# EAGLE board SK.v0.2 (EAGLE 6.1)
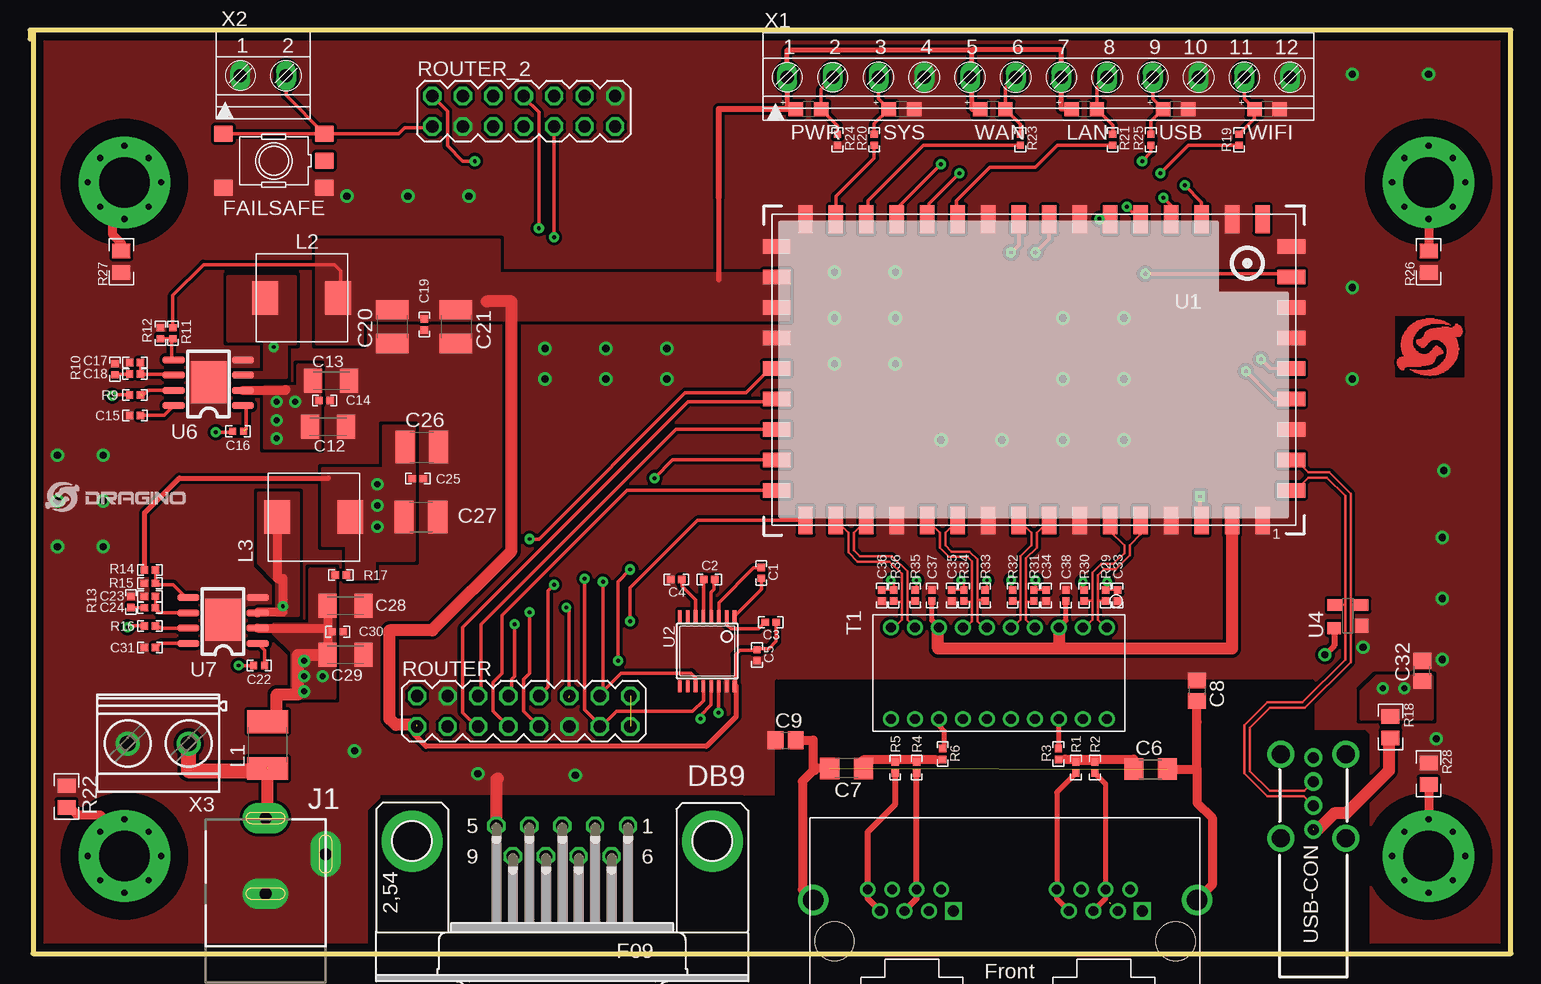
[diagram p0: board, top side]
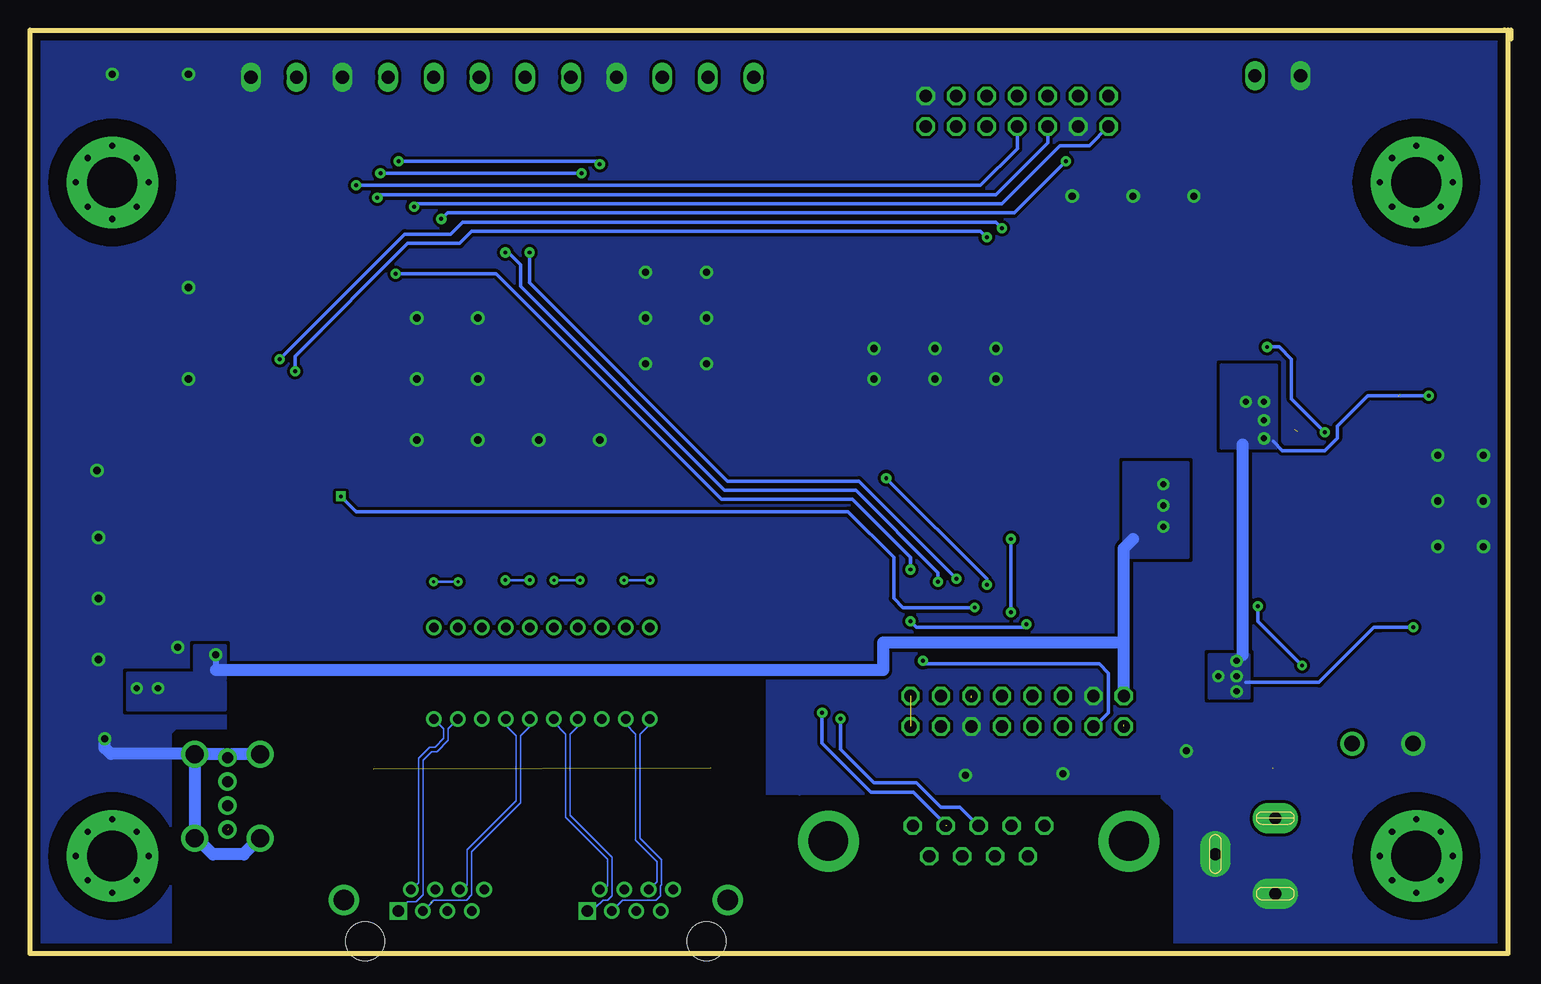
[diagram p1: board, bottom side, seen from below]

Size 123.44 x 76.96 mm. Coordinates in mm from the lower left corner, seen from the top.
Outline: 0.51,76.96 0.25,76.96 0.25,0 123.44,0 123.44,76.96 0,76.96 0,76.2
Copper layers (1*16): Top 0.035mm / dielectric 1.5mm / Bottom 0.035mm
Design rules: minimum track width 5mil, minimum drill 10mil, track to track 8mil, track to pad 8mil, pad to pad 8mil, via to via 10mil, smd to smd 8mil, copper to edge 26mil, drill to drill 10mil, minimum pad ring 10mil, minimum via ring 10mil, stop-mask expansion 1mil, vias tented up to drill 30mil, thermal gap 10mil
Net classes: 0 default: width 0.203 mm, clearance 0.254 mm; 1 power: width 0.61 mm, drill 0.406 mm, clearance 0.254 mm; 2 gnd: width 0.305 mm, drill 0.305 mm, clearance 0.254 mm; 3 usbvcc: width 0.508 mm, drill 0.61 mm, clearance 0.254 mm; 4 aref: width 0.406 mm, drill 0.61 mm, clearance 0.254 mm
tRestrict: area 28.2,0.3 to 60.5,13.2; area 59.4,0 to 111.5,22.7
bRestrict: area 28.2,0.3 to 60.5,13.2; area 59.4,0 to 111.5,22.7

## Footprints (pad centres in the part's own frame; a part is rotated, then mirrored left to right if it is on the bottom)
C0402 = smd 0.61 x 0.61: 1 -0.457,0; 2 0.457,0
C1206 = smd 1.6 x 1.8: 1 -1.4,0; 2 1.4,0
C0805 = smd 1.3 x 1.5: 1 -0.85,0; 2 0.85,0
C1206K = smd 1.5 x 2: 1 -1.5,0; 2 1.5,0
C1210 = smd 1.6 x 2.7: 1 -1.4,0; 2 1.4,0
F09HP = drill 1.016 octagon: 1 -5.486,-1.27; 2 -2.743,-1.27; 3 0,-1.27; 4 2.743,-1.27; 5 5.486,-1.27; 6 -4.115,1.27; 7 -1.372,1.27; 8 1.372,1.27; 9 4.115,1.27 | drill 3.302 pad 5.08: G1 -12.522,0; G2 12.522,0
TS42 = smd 1.6 x 1.4: 1 -4.2,2.25; 2 4.2,2.25; 3 -4.2,-2.25; 4 4.2,-2.25; 5 -4.2,0
POWER_JACK_SLOT = drill 1 pad 2.54 long: GND@1 2.58,7.5; GND@2 7.58,10.8; PWR 2.58,13.8
ETHERNET-1X2 = drill 0.94 pad 1.27 square: 1-1 4.305,-2.54; 2-1 -11.445,-2.54 | drill 0.8: 1-2 5.325,-4.32; 1-3 6.345,-2.54; 1-4 7.365,-4.32; 1-5 8.385,-2.54; 1-6 9.405,-4.32; 1-7 10.425,-2.54; 1-8 11.445,-4.32; 2-2 -10.425,-4.32; 2-3 -9.405,-2.54; 2-4 -8.385,-4.32; 2-5 -7.365,-2.54; 2-6 -6.345,-4.32; 2-7 -5.325,-2.54; 2-8 -4.305,-4.32 | drill 1.7: S1 16,-3.43; S2 -16,-3.43 | hole 3.25: -14.225,0; 14.225,0
L1812 = smd 1.9 x 3.4: 1 -1.95,0; 2 1.95,0
INDUCTOR-74 = smd 2.794 x 2.159: P$1 0,3.048; P$2 0,-3.048
CHIP-LED0805 = smd 1.2 x 1.2: A 0,-1.05; C 0,1.05
R0402 = smd 0.61 x 0.61: 1 -0.457,0; 2 0.457,0
R0805 = smd 1.2 x 1.5: 1 -0.9,0; 2 0.9,0
MA08-2 = drill 1.016 octagon: 1 -8.89,-1.27; 2 -8.89,1.27; 3 -6.35,-1.27; 4 -6.35,1.27; 5 -3.81,-1.27; 6 -3.81,1.27; 7 -1.27,-1.27; 8 -1.27,1.27; 9 1.27,-1.27; 10 1.27,1.27; 11 3.81,-1.27; 12 3.81,1.27; 13 6.35,-1.27; 14 6.35,1.27; 15 8.89,-1.27; 16 8.89,1.27
MA07-2 = drill 1.016 octagon: 1 -7.62,-1.27; 2 -7.62,1.27; 3 -5.08,-1.27; 4 -5.08,1.27; 5 -2.54,-1.27; 6 -2.54,1.27; 7 0,-1.27; 8 0,1.27; 9 2.54,-1.27; 10 2.54,1.27; 11 5.08,-1.27; 12 5.08,1.27; 13 7.62,-1.27; 14 7.62,1.27
RIONET_H2038 = drill 0.8: 1 -3.81,9; 2 -3.81,7; 3 -3.81,5; 4 -3.81,3; 5 -3.81,1; 6 -3.81,-1; 7 -3.81,-3; 8 -3.81,-5; 9 -3.81,-7; 10 -3.81,-9; 11 3.81,-9; 12 3.81,-7; 13 3.81,-5; 14 3.81,-3; 15 3.81,-1; 16 3.81,1; 17 3.81,3; 18 3.81,5; 19 3.81,7; 20 3.81,9
HE50 = smd 1.2 x 2.3: 1 -19.05,12.55; 2 -16.51,12.55; 3 -13.97,12.55; 4 -11.43,12.55; 5 -8.89,12.55; 6 -6.35,12.55; 7 -3.81,12.55; 8 -1.27,12.55; 9 1.27,12.55; 10 3.81,12.55; 11 6.35,12.55; 12 8.89,12.55; 13 11.43,12.55; 14 13.97,12.55; 15 16.51,12.55; 16 19.05,12.55; 26 19.05,-12.55; 27 16.51,-12.55; 28 13.97,-12.55; 29 11.43,-12.55; 30 8.89,-12.55; 31 6.35,-12.55; 32 3.81,-12.55; 33 1.27,-12.55; 34 -1.27,-12.55; 35 -3.81,-12.55; 36 -6.35,-12.55; 37 -8.89,-12.55; 38 -11.43,-12.55; 39 -13.97,-12.55; 40 -16.51,-12.55; 41 -19.05,-12.55 | smd 2.3 x 1.2: 17 21.45,10.05; 18 21.45,7.51; 19 21.45,4.97; 20 21.45,2.43; 21 21.45,-0.11; 22 21.45,-2.65; 23 21.45,-5.19; 24 21.45,-7.73; 25 21.45,-10.27; 42 -21.45,-10.27; 43 -21.45,-7.73; 44 -21.45,-5.19; 45 -21.45,-2.65; 46 -21.45,-0.11; 47 -21.45,2.43; 48 -21.45,4.97; 49 -21.45,7.51; 50 -21.45,10.05
MAXIM_-_??_TSSOP16 = smd 0.305 x 0.991: 1 -2.275,-2.918; 2 -1.625,-2.918; 3 -0.975,-2.918; 4 -0.325,-2.918; 5 0.325,-2.918; 6 0.975,-2.918; 7 1.625,-2.918; 8 2.275,-2.918; 9 2.275,2.918; 10 1.625,2.918; 11 0.975,2.918; 12 0.325,2.918; 13 -0.325,2.918; 14 -0.975,2.918; 15 -1.625,2.918; 16 -2.275,2.918
SOT143 = smd 1.194 x 1.118: 1 -0.72,-1.181 | smd 0.991 x 1.194: 2 1.007,-1.143; 3 1.007,1.067 | smd 0.991 x 1.118: 4 -0.923,1.105
RT8250-SOP8 = smd 1.88 x 0.61: 1 -1.219,0; 2 -1.219,-1.27; 3 -1.219,-2.54; 4 -1.219,-3.81; 5 4.547,-3.81; 6 4.547,-2.54; 7 4.547,-1.27; 8 4.547,0 | smd 2.997 x 3.505: 9 1.651,-1.956
METAL_HOLE = drill 4.191 pad 7.62: P$1 0,0 | drill 0.508 pad 0.61: P$2 3.048,0; P$3 -3.048,0; P$4 0,3.048; P$5 0,-3.048; P$6 -2.032,2.032; P$7 2.032,2.032; P$8 2.032,-2.032; P$9 -2.032,-2.032
CON-USB-AH = drill 0.914 pad 1.524: 1 0,1.877; 2 0,3.876; 3 0,5.875; 4 0,7.874 | drill 1.499 pad 2.159: 5 -2.718,1.148; 6 -2.718,8.146; 7 2.718,1.148; 8 2.718,8.146
12POL381 = drill 1.1 long: 1 0,0; 2 3.81,0; 3 7.62,0; 4 11.43,0; 5 15.24,0; 6 19.05,0; 7 22.86,0; 8 26.67,0; 9 30.48,0; 10 34.29,0; 11 38.1,0; 12 41.91,0
2POL381 = drill 1.1 long: 1 0,0; 2 3.81,0
MKDSN1,5/2-5,08 = drill 1.3 pad 2: 1 -2.561,0.025; 2 2.519,0.025

## Placement (x,y rotation side)
C1  0.1u  [C0402]  60.97,31.72 90 top
C2  0.1u  [C0402]  56.62,31.17 0 top
C3  0.1u  [C0402]  61.75,27.61 180 top
C4  0.1u  [C0402]  53.87,31.17 180 top
C5  0.1u  [C0402]  60.61,24.87 90 top
C6  1000pF,2kv  [C1206]  93.41,15.37 0 top
C7  1000pF,2kv  [C1206]  68.07,15.43 180 top
C8  0.1u,100V  [C0805]  97.28,21.91 270 top
C9  0.1u,100V  [C0805]  62.99,17.78 0 top
C12  10uf,25v  [C1206K]  24.86,43.89 0 top
C13  10u,25v  [C1206K]  25.11,47.75 0 top
C14  NL  [C0402]  24.56,46.09 0 top
C15  0.1u,10v  [C0402]  8.76,44.85 180 top
C16  0.01u,16v  [C0402]  17.35,43.52 180 top
C17  NL  [C0402]  8.76,49.25 0 top
C18  3900pf,25v  [C0402]  8.76,48.29 0 top
C19  NL  [C0402]  32.88,52.43 90 top
C20  22u,10v  [C1210]  30.2,52.24 270 top
C21  22u,10v  [C1210]  35.51,52.24 270 top
C22  0.01u,16v  [C0402]  19.1,24.01 180 top
C23  NL  [C0402]  10.01,29.77 0 top
C24  3900pf,25v  [C0402]  10.01,28.82 0 top
C25  NL  [C0402]  32.33,39.57 180 top
C26  22u,10v  [C1210]  32.67,42.2 0 top
C27  22u,10v  [C1210]  32.6,36.38 0 top
C28  10uf,25v  [C1206K]  26.3,28.96 0 top
C29  10u,25v  [C1206K]  26.3,24.92 0 top
C30  NL  [C0402]  25.65,26.81 0 top
C31  0.1u,10v  [C0402]  10.01,25.51 180 top
C32  10u,10V  [C0805]  116.04,23.55 90 top
C33  0.1u 10v  [C0402]  90.68,29.85 270 top
C34  0.1u 10v  [C0402]  84.71,29.85 270 top
C35  0.1u 10v  [C0402]  76.83,29.85 270 top
C36  0.1u 10v  [C0402]  70.99,29.85 270 top
C37  0.1u  [C0402]  75.18,29.85 90 top
C38  0.1u  [C0402]  86.36,29.85 90 top
DB9  [F09HP]  44.37,9.37 180 top
FAILSAFE  [TS42]  20.33,66.06 180 top
J1  POWER_JACKSLT  [POWER_JACK_SLOT]  17.05,-2.51 0 top
J2  ETHERNET_2PORT  [ETHERNET-1X2]  81.28,1.02 180 top
L1  2A  [L1812]  19.82,17.38 90 top
L2  10uH  [INDUCTOR-74]  22.65,54.65 90 top
L3  15uH  [INDUCTOR-74]  23.66,36.36 90 top
LAN  [CHIP-LED0805]  87.88,70.36 270 top
PWR  [CHIP-LED0805]  64.9,70.36 270 top
R1  75  [R0402]  87.19,15.49 270 top
R2  75  [R0402]  88.77,15.49 270 top
R3  75  [R0402]  85.73,16.64 270 top
R4  75  [R0402]  73.91,15.49 270 top
R5  75  [R0402]  72.14,15.49 270 top
R6  75  [R0402]  76.07,16.64 270 top
R9  100K  [R0402]  8.76,46.56 180 top
R10  6.81K  [R0402]  7.08,48.69 270 top
R11  26.1K  [R0402]  11.91,51.69 90 top
R12  10K  [R0402]  10.88,51.69 270 top
R13  6.81K  [R0402]  8.42,29.29 270 top
R14  45.3K  [R0402]  10.01,31.97 180 top
R15  10K  [R0402]  10.01,30.85 0 top
R16  100K  [R0402]  10.01,27.31 180 top
R17  NL  [R0402]  25.91,31.55 180 top
R18  0R  [R0805]  113.4,18.87 270 top
R19  270  [R0402]  100.79,67.82 90 top
R20  270  [R0402]  70.37,67.82 90 top
R21  330  [R0402]  90.25,67.82 90 top
R22  NL  [R0805]  3.05,13.08 270 top
R23  330  [R0402]  82.56,67.82 90 top
R24  330  [R0402]  67.32,67.82 90 top
R25  270  [R0402]  93.44,67.82 90 top
R26  NL  [R0805]  116.59,57.66 90 top
R27  NL  [R0805]  7.62,57.66 90 top
R28  NL  [R0805]  116.59,14.99 270 top
R29  49.9  [R0402]  89.66,29.85 90 top
R30  49.9  [R0402]  87.88,29.85 90 top
R31  49.9  [R0402]  83.69,29.85 90 top
R32  49.9  [R0402]  81.91,29.85 90 top
R33  49.9  [R0402]  79.63,29.85 90 top
R34  49.9  [R0402]  77.85,29.85 90 top
R35  49.9  [R0402]  73.79,29.85 90 top
R36  49.9  [R0402]  72.01,29.85 90 top
ROUTER  [MA08-2]  41.16,20.19 0 top
ROUTER_2  [MA07-2]  41.16,70.19 0 top
SYS  [CHIP-LED0805]  72.64,70.36 270 top
T1  RJ45_TRANSFORMER_HST2038DR  [RIONET_H2038]  80.77,23.37 270 top
U1  HE  [HE50]  83.69,48.64 180 top
U2  ADM3202A"  [MAXIM_-_??_TSSOP16]  56.46,25.2 180 top
U4  YSSR05  [SOT143]  109.83,28.04 90 top
U6  RT8250  [RT8250-SOP8]  16.54,45.66 180 top
U7  RT8250  [RT8250-SOP8]  17.75,25.85 180 top
U$1  LOGO-NEW  [LOGO-SILK-NEW]  1.27,36.83 0 top
U$2  [DRGAINO_LOGO_STOP]  113.79,48.01 0 top
U$11  METAL-HOLE  [METAL_HOLE]  7.87,8.13 0 top
U$12  METAL-HOLE  [METAL_HOLE]  116.59,64.26 0 top
U$13  METAL-HOLE  [METAL_HOLE]  7.87,64.26 0 top
U$14  METAL-HOLE  [METAL_HOLE]  116.59,8.13 0 top
USB  [CHIP-LED0805]  95.5,70.36 270 top
USB-CON  USB-CON-AVERTICAL  [CON-USB-AH]  106.98,8.46 0 top
WAN  [CHIP-LED0805]  80.26,70.36 270 top
WIFI  [CHIP-LED0805]  103.12,70.36 270 top
X1  [12POL381]  63.12,73.03 0 top
X2  [2POL381]  17.53,73.15 0 top
X3  [MKDSN1,5/2-5,08]  10.67,17.53 180 top

## Library data of the parts
C1-C9 C12-C38 FAILSAFE J1 J2 L1-L3 LAN PWR R1-R6 R9-R36 SYS T1 U1 U2 U4 U6 U7 U$1 U$2 U$11-U$14 USB USB-CON WAN WIFI = dragino
DB9 = con-subd; OC_FARNELL: unknown; OC_NEWARK: unknown
ROUTER ROUTER_2 = dragino; OC_FARNELL: unknown; OC_NEWARK: unknown
X1 X2 = con-phoenix-381
X3 = con-phoenix-508; MPN: MKDSN 1,5/2-5.08; OC_FARNELL: 1792903; OC_NEWARK: 30M2397

## Nets
2.0V_CTL: C37.1 C38.1 T1.3 T1.8 U1.2
3.3V: C3.1 C5.2 C19.2 C20.1 C21.1 L2.P$2 LAN.A PWR.A R11.2 ROUTER.1 U1.23 U1.24 U2.16 WAN.A X1.1 X1.5 X1.7
5-GND: FAILSAFE.5
+5V: C25.2 C26.1 C27.1 C32.1 L3.P$2 R14.2 R17.1 R18.1 ROUTER.2 U4.4
AGND: C6.2 C7.2 C8.2 C9.2 J2.S1 J2.S2
GND [gnd]: C4.2 C5.1 C8.1 C9.1 C12.2 C13.2 C14.2 C15.2 C17.1 C19.1 C20.2 C21.2 C23.1 C25.1 C26.2 C27.2 C28.2 C29.2 C30.2 C31.2 C32.2 C33.2 C34.2 C35.2 C36.2 C37.2 C38.2 DB9.5 FAILSAFE.1 FAILSAFE.2 J1.GND@1 J1.GND@2 R10.1 R12.1 R13.1 R15.1 R22.1 R24.1 R26.1 R27.1 R28.1 ROUTER.4 ROUTER.11 ROUTER_2.3 ROUTER_2.14 SYS.C U1.1 U1.4 U1.7 U1.10 U1.13 U1.22 U1.25 U1.26 U1.32 U1.35 U1.40 U1.42 U1.44 U1.45 U1.48 U2.15 U4.1 U6.4 U6.9 U7.4 U7.9 USB-CON.4 USB-CON.5 USB-CON.6 USB-CON.7 USB-CON.8 USB.C WIFI.C X1.4 X1.10 X1.12 X2.1 X3.2
GPIO11: FAILSAFE.3 FAILSAFE.4 ROUTER_2.1 U1.37 X2.2
GPIO12: ROUTER_2.2 U1.36
GPIO15: ROUTER_2.5 U1.38
GPIO16: ROUTER_2.7 U1.39
GPIO18: ROUTER.10 U1.18
GPIO19: ROUTER.6 U1.19
GPIO20: ROUTER.5 U1.20
GPIO21: ROUTER.8 U1.16
GPIO22: ROUTER.7 U1.17
GPIO23: ROUTER.9 U1.21
GPIO24: ROUTER.12 U1.3
GPIO26: ROUTER_2.9 U1.47
GPIO27: ROUTER_2.8 U1.46
GPIO28: R20.1 U1.27
LED0: R19.1 U1.30
LED1: R25.1 U1.29
LED2: R21.1 U1.31
LED6: R23.1 U1.28
N$1: C1.2 U2.3
N$2: C1.1 U2.1
N$3: C2.2 U2.4
N$4: C2.1 U2.5
N$5: C3.2 U2.2
N$6: C4.1 U2.6
N$7: R6.1 T1.13
N$10: DB9.2 U2.14
N$11: DB9.3 U2.13
N$12: J1.PWR L1.1 X3.1
N$13: R9.1 U6.7
N$15: R22.2 U$11.P$1
N$16: C15.1 U6.8
N$17: C16.1 U6.1
N$18: C16.2 L2.P$1 U6.3
N$19: C17.2 C18.2 U6.6
N$20: C18.1 R10.2
N$21: R18.2 USB-CON.1
N$22: R11.1 R12.2 U6.5
N$23: R19.2 WIFI.A X1.11
N$24: C22.1 U7.1
N$25: C22.2 L3.P$1 U7.3
N$26: C23.2 C24.2 U7.6
N$27: C24.1 R13.2
N$28: R20.2 SYS.A X1.3
N$29: R14.1 R15.2 U7.5
N$30: LAN.C R21.2 X1.8
N$31: R16.1 U7.7
N$32: C31.1 U7.8
N$33: R26.2 U$12.P$1
N$34: R23.2 WAN.C X1.6
N$35: PWR.C R24.2 X1.2
N$36: R25.2 USB.A X1.9
N$37: R27.2 U$13.P$1
N$38: R28.2 U$14.P$1
N$39: C35.1 R33.2 R34.2
N$40: C36.1 R35.2 R36.2
N$41: J2.2-7 J2.2-8 R1.2
N$42: J2.2-4 J2.2-5 R2.2
N$43: C33.1 R29.2 R30.2
N$44: C34.1 R31.2 R32.2
N$45: R3.1 T1.18
N$46: C6.1 R1.1 R2.1 R3.2
N$51: J2.1-7 J2.1-8 R5.2
N$52: J2.1-4 J2.1-5 R4.2
N$54: C7.1 R4.1 R5.1 R6.2
NC: ROUTER.15 ROUTER.16
OPTIONAL_ANT: U1.41
P0_R_N: J2.2-6 T1.17
P0_R_P: J2.2-3 T1.16
P0_RX_N: R31.1 T1.4 U1.8
P0_RX_P: R32.1 T1.5 U1.9
P0_T_N: J2.2-2 T1.20
P0_T_P: J2.2-1 T1.19
P0_TX_N: R29.1 T1.1 U1.5
P0_TX_P: R30.1 T1.2 U1.6
P4_R_N: J2.1-6 T1.12
P4_R_P: J2.1-3 T1.11
P4_RX_N: R35.1 T1.9 U1.14
P4_RX_P: R36.1 T1.10 U1.15
P4_T_N: J2.1-2 T1.15
P4_T_P: J2.1-1 T1.14
P4_TX_N: R33.1 T1.6 U1.11
P4_TX_P: R34.1 T1.7 U1.12
RESET_ROUTE: ROUTER.3 U1.43
UART_RX: ROUTER.13 U1.33 U2.12
UART_TX: ROUTER.14 U1.34 U2.11
USB_N: U1.50 U4.3 USB-CON.2
USB_P: U1.49 U4.2 USB-CON.3
VIN: C12.1 C13.1 C14.1 C28.1 C29.1 C30.1 L1.2 R9.2 R16.2 R17.2 U6.2 U7.2

## Tracks (layer width: path | path; a pad name or v marks a point on that pad's centre or on a via)
2.0V_CTL
  Top 0.406: T1.3 86.36,27.77 C38.1 | T1.8 75.18,27.77 C37.1
  Top 1.016: U1.2 100.2,25.4 85.77,25.4 | 85.77,25.4 75.69,25.4 75.69,27.18 T1.8 | T1.3 85.77,25.4
3.3V  (1 unrouted)
  Top 0.305: R11.2 11.91,54.84 14.48,57.4 25.4,57.4 25.91,56.9 25.91,55.12 25.65,54.86 | C3.1 62.2,26.01 61.59,25.4 60.71,25.4 60.61,25.3 | 60.61,25.3 C5.2 60.66,25.32 60.71,25.27 | 60.61,25.3 60.58,25.27 59.18,25.27 58.8,24.89 58.8,22.36 U2.16 58.86,22.29
  Top 0.406: 57.4,64.01 57.4,62.99 57.4,56.13 | 58.86,22.29 58.86,19.75 56.39,17.27 33.02,17.27 32,18.29 32,18.8 32.26,19.05 | 78.49,75.31 63.12,75.31 X1.1 63.12,70.36 PWR.A | 78.49,75.31 78.49,73.03 | 78.49,73.03 X1.5 | 78.49,75.31 85.98,75.31 X1.7 85.98,70.36 LAN.A | 78.49,73.03 78.49,70.36 WAN.A
  Top 0.508: PWR.A 57.4,70.36 57.4,62.99
  Top 1.016: ROUTER.1 32.14,19.05 30.48,19.05 29.97,19.56 29.97,26.92 33.53,26.92 40.13,33.53 40.13,54.36 38.1,54.36
  pour Top (no thermals): 23.88,59.44 23.88,50.8 27.69,50.8 27.69,52.83 39.12,52.83 39.12,59.44
  pour Top (no thermals): 39.12,56.13 39.12,56.64 63.25,56.64 63.25,52.83 38.86,52.83 38.86,56.13
+5V  (via drill 0.51 pad 0.81, 0.58)
  Top 0.406: R14.2 9.55,36.73 12.45,39.62 24.89,39.62
  Top 0.508: U4.4 108.72,25.66 v107.95,24.89
  Bottom 0.508: v107.95,24.89 107.95,23.62
  Bottom 1.016: 32.27,25.91 32.27,33.77 31.5,34.54 | ROUTER.2 32.27,25.91 | 32.27,25.91 52.32,25.91 52.32,23.62 107.95,23.62
  other vias: 28.96,39.12 28.96,37.34 28.96,35.56 112.78,22.1 114.55,22.1
  pour Top (no thermals): 26.42,31.24 26.42,34.04 24.38,34.04 24.38,40.39 29.46,40.39 29.46,43.94 32,43.94 32,32.77 28.7,32.77 28.7,31.24
  pour Bottom: 26.92,40.89 26.92,33.02 32.26,33.02 32.26,40.89
  pour Bottom (no thermals): 107.19,25.65 107.19,20.32 115.32,20.32 115.32,23.37 109.73,23.37 109.73,25.65
  pour Top (no thermals): 111,21.84 112.27,23.11 116.84,23.11 116.84,19.56 111,19.56
AGND  (1 unrouted)
  Top 0.762: C6.2 97.28,15.37 | C7.2 65.28,15.43 | 65.28,15.43 65.28,15.24 | J2.S1 64.39,5.33 64.39,14.35 65.28,15.24 | C9.2 65.28,17.78 65.28,15.43 | 65.41,15.24 65.28,15.24 | 97.28,15.37 97.28,19.28 C8.2 | 97.28,15.37 97.28,12.58 98.55,11.3 98.55,5.72 J2.S2
GND  (via drill 0.6)
  Top 1.016: DB9.5 38.88,14.5 38.99,14.61
  Bottom 1.016: USB-CON.6 106.71,16.6 USB-CON.4 107.25,16.6 USB-CON.8 | USB-CON.8 USB-CON.7 109.56,9.61 108.2,8.26 105.61,8.26 USB-CON.5 | USB-CON.8 109.73,16.64 116.71,16.64 117.22,17.15 v117.22,17.91
  other vias: 117.86,40.26 111.12,25.53 37.34,14.99 27.05,16.89 45.47,14.86 117.73,34.67 117.73,29.59 117.73,24.51 86.11,52.96 91.19,52.96 91.19,47.88 86.11,47.88 75.95,42.8 86.11,42.8 91.19,42.8 81.03,42.8 67.06,56.77 72.14,56.77 72.14,52.96 67.06,52.96 67.06,49.15 72.14,49.15 42.93,50.42 48.01,50.42 53.09,50.42 53.09,47.88 48.01,47.88 42.93,47.88 110.24,73.28 116.59,73.28 110.24,55.5 110.24,47.88 26.42,63.12 31.5,63.12 36.58,63.12 2.29,41.53 6.1,41.53 6.1,37.72 2.29,37.72 2.29,33.91 6.1,33.91
  pour Top (rank 2, no thermals): 0.51,76.96 0.51,0.25 122.94,0.25 122.94,76.96
  pour Bottom (rank 2, no thermals): 0.51,76.96 0.51,0.25 122.94,0.25 122.94,76.96
GPIO11  (via drill 0.33)
  Top 0.305: FAILSAFE.4 FAILSAFE.3 | U1.37 92.48,61.2 v91.44,62.23 | FAILSAFE.3 30.72,68.31 31.24,68.83 33.53,68.83 33.54,68.84 ROUTER_2.1 | X2.2 21.34,71.51 FAILSAFE.3
  Bottom 0.305: v91.44,62.23 91.19,62.48 42.42,62.48 37.59,67.31 35.15,67.31 ROUTER_2.1
GPIO12  (via drill 0.33)
  Top 0.305: U1.36 89.17,61.2 v89.15,61.21 | v37.08,66.04 36.07,66.04 34.8,67.31 34.8,70.2 ROUTER_2.2
  Bottom 0.305: v89.15,61.21 88.65,61.72 41.4,61.72 v37.08,66.04
GPIO15  (via drill 0.33)
  Top 0.305: U1.38 95.12,62.36 v94.49,62.99
  Bottom 0.305: v94.49,62.99 94.23,63.25 42.93,63.25 38.61,67.56 ROUTER_2.5
GPIO16  (via drill 0.33)
  Top 0.305: U1.39 97.66,62.62 v96.27,64.01
  Bottom 0.305: v96.27,64.01 44.2,64.01 41.15,67.06 ROUTER_2.7
GPIO18  (via drill 0.33)
  Top 0.305: U1.18 53.58,41.14 v52.07,39.62 | v43.69,30.73 43.18,30.23 43.18,22.22 ROUTER.10
  Bottom 0.305: v52.07,39.62 43.69,31.24 v43.69,30.73
GPIO19
  Top 0.305: U1.19 53.83,43.68 37.59,27.43 37.59,21.71 ROUTER.6
GPIO20
  Top 0.305: ROUTER.5 37.21,18.92 36.07,20.07 36.07,27.18 54.86,45.97 62,45.97 U1.20
GPIO21  (via drill 0.33)
  Top 0.305: U1.16 55.65,36.09 50.04,30.48 v50.04,27.69 | v40.39,27.43 40.39,23.11 40.13,22.86 40.13,21.71 ROUTER.8
  Bottom 0.305: v50.04,27.69 49.53,27.18 40.64,27.18 v40.39,27.43
GPIO22
  Top 0.305: U1.17 49.77,38.59 39.37,28.19 39.37,23.37 38.61,22.61 38.61,20.2 ROUTER.7
GPIO23  (via drill 0.33)
  Top 0.305: U1.21 61.71,48.76 59.69,46.74 54.61,46.74 42.42,34.54 v41.66,34.54 | v41.66,28.45 41.66,23.37 41.15,22.86 41.15,20.2 ROUTER.9
  Bottom 0.305: v41.66,34.54 v41.66,28.45
GPIO24  (via drill 0.3)  (1 unrouted)
  Top 0.305: U1.3 97.54,36.22 v97.54,38.1 | v44.7,28.83 44.96,28.58 44.96,21.34
  Bottom 0.305: v97.54,38.1 96.27,36.83 55.25,36.83 51.44,33.02 51.44,29.59 50.67,28.83 v44.7,28.83
GPIO26  (via drill 0.33)
  Top 0.305: U1.47 103.64,46.22 v101.35,48.51 | v43.69,59.69 ROUTER_2.9
  Bottom 0.305: v101.35,48.51 101.35,49.78 91.95,59.18 87.63,59.18 86.61,60.2 44.2,60.2 v43.69,59.69
GPIO27  (via drill 0.33)
  Top 0.305: U1.46 103.39,48.76 v102.62,49.53 | ROUTER_2.8 41.15,71.37 42.42,70.1 v42.42,60.45
  Bottom 0.305: v102.62,49.53 92.2,59.94 88.39,59.94 87.38,60.96 42.93,60.96 v42.42,60.45
GPIO28
  Top 0.305: U1.27 67.18,63.11 70.36,66.29 70.36,67.34 R20.1
LED0  (via drill 0.33)
  Top 0.305: R19.1 96.57,67.36 v94.23,65.02 | v77.47,65.02 74.93,62.48 74.93,61.33 U1.30
  Bottom 0.305: v94.23,65.02 v77.47,65.02
LED1  (via drill 0.33)
  Top 0.305: R25.1 93.44,66.77 v92.71,66.04 | v75.95,65.79 72.39,62.23 72.39,61.33 U1.29
  Bottom 0.305: v92.71,66.04 76.2,66.04 v75.95,65.79
LED2
  Top 0.305: R21.1 85.65,67.36 83.82,65.53 80.01,65.53 77.22,62.74 77.22,61.32 U1.31
LED6
  Top 0.305: R23.1 74.47,67.36 69.85,62.74 69.85,61.33 U1.28
N$1
  Top 0.305: U2.3 57.43,29.24 60.33,32.13 61.02,32.13 | 61.09,32.13 61.02,32.13 | 61.02,32.13 C1.2
N$2
  Top 0.305: U2.1 60.97,30.36 C1.1
N$3
  Top 0.305: U2.4 56.78,30.11 57.02,30.35 57.02,31.12 57.15,31.24 57.02,31.24 57.07,31.19 C2.2
N$4
  Top 0.305: U2.5 56.13,31.11 56.16,31.14 C2.1
N$5
  Top 0.305: U2.2 58.08,27.39 58.42,27.05 60.73,27.05 C3.2
N$6
  Top 0.305: U2.6 55.48,29.48 54.36,30.61 54.36,31.19 | 54.36,31.24 54.36,31.19 | 54.36,31.19 C4.1
N$7
  Top 0.406: T1.13 75.77,18.97 76.2,18.54 76.2,17.15 76.15,17.09 R6.1
N$10  (via drill 0.33 pad 0.64)  (1 unrouted)
  Top 0.305: U2.14 57.4,22.29 v57.4,20.07
  Bottom 0.305: v57.4,20.07 57.4,17.53 53.34,13.46 49.78,13.46 46.99,10.67
N$11  (via drill 0.33 pad 0.64)
  Top 0.305: U2.13 56.78,20.71 55.88,19.81 v55.88,19.56
  Bottom 0.305: v55.88,19.56 55.88,17.02 53.09,14.22 49.53,14.22 47.5,12.19 45.91,12.19 DB9.3
N$12  (1 unrouted)
  Top 1.016: J1.PWR 19.81,11.3 19.81,15.49
  Top 1.27: X3.1 13.21,17.5 13.21,15.24 19.82,15.24 | 19.94,15.24 19.82,15.24 | 19.82,15.24 L1.1
N$13  (1 unrouted)
  Top 0.305: U6.7 9.85,46.93 9.4,46.48
N$15
  Top 0.762: U$11.P$1 7.87,8.26 7.87,8.38 7.87,9.53 5.84,11.56 3.94,11.56 3.3,12.19 R22.2
N$16
  Top 0.305: C15.1 11.17,44.85 U6.8
N$17  (1 unrouted)
  Top 0.305: U6.1 18.03,45.38 18.03,43.69
N$18  (via drill 0.33)
  Top 0.305: v15.49,43.43 16.89,43.43 C16.2 | v20.32,50.55 20.32,50.8
  Bottom 0.305: v15.49,43.43 18.29,46.23 18.29,49.53 19.3,50.55 v20.32,50.55
  pour Top (no thermals): 16.51,56.39 16.51,51.05 19.56,51.05 19.56,48.39 17.02,48.39 17.02,48.01 21.34,48.01 21.34,50.8 22.1,50.8 22.1,56.39
N$19
  Top 0.305: U6.6 11.9,48.3 C18.2 C17.2
N$20
  Top 0.305: R10.2 7.1,48.26 8.34,48.26 | C18.1 8.34,48.26 | 8.34,48.26 8.38,48.26
N$21  (1 unrouted)
  Top 1.016: R18.2 113.28,17.9 113.28,15.24 109.73,11.68 108.71,11.68 107.44,10.41 106.93,10.41
N$22
  Top 0.305: U6.5 11.81,49.65 11.81,51.18 11.86,51.18 R11.1 R12.2 | R12.2
N$23
  Top 0.305: R19.2 102.07,69.56 WIFI.A 101.22,71.21 X1.11
N$24
  Top 0.305: U7.1 19.56,25.27 C22.1
N$25  (via drill 0.3, 0.33 pad 0.64)
  Top 0.305: 21.34,29.46 21.08,29.72 | C22.2 18.63,24 v17.4,24
  Top 0.762: U7.3 19.03,28.45 21.08,28.45 v21.08,28.96 21.08,31.24 20.61,31.24 L3.P$1
  Bottom 0.305: v17.4,24 21.08,27.69 v21.08,28.96
  pour Top (no thermals): 19.05,38.35 19.05,32.51 20.57,30.99 20.57,28.19 22.35,28.19 22.35,38.35
N$26
  Top 0.305: U7.6 10.72,28.39 10.41,28.7 10.46,28.75 C24.2 C23.2
N$27
  Top 0.305: R13.2 9.52,28.83 9.55,28.8 | C24.1 9.55,28.8 | 9.55,28.8 9.65,28.7
N$28
  Top 0.305: R20.2 70.38,69.14 SYS.A 70.74,71.21 X1.3
N$29
  Top 0.305: U7.5 13.01,29.66 11.94,30.73 10.67,30.73 10.46,30.94 | 10.46,30.94 R15.2 10.46,31.95 10.45,31.97 | 10.46,30.94 10.41,30.99 | R14.1 10.45,31.97 | 10.45,31.97 10.41,32
N$30
  Top 0.305: R21.2 90.25,69.04 LAN.C 88.93,72.17 X1.8
N$31
  Top 0.305: U7.7 10.92,27.12 10.92,27.18 10.46,27.18 R16.1
N$32
  Top 0.305: 13.21,25.76 13.21,25.78 U7.8 | U7.8 13.21,25.91 | U7.8 10.86,25.85 10.46,25.45 | C31.1 10.46,25.45 | 10.46,25.45 10.41,25.4 | U7.8
N$33
  Top 0.762: U$12.P$1 R26.2
N$34
  Top 0.305: R23.2 82.56,69.11 WAN.C 81.31,72.17 X1.6
N$35
  Top 0.305: R24.2 67.32,68.99 PWR.C 65.95,72.04 X1.2
N$36
  Top 0.305: R25.2 93.44,69.34 USB.A 93.6,71.21 X1.9
N$37
  Top 0.762: U$13.P$1 6.86,63.25 6.86,59.94 7.62,59.18 R27.2 7.62,58.42
N$38
  Top 0.762: R28.2 U$14.P$1
N$39  (via drill 0.25)
  Top 0.203: R33.2 79.76,30.3 v79.76,31.12 | v77.6,31.12 77.85,30.86 R34.2 C35.1
  Bottom 0.203: v79.76,31.12 v77.6,31.12
N$40  (via drill 0.25)
  Top 0.203: R35.2 73.91,30.43 v73.91,31.12 | v71.75,31.12 72.01,30.86 R36.2 C36.1
  Bottom 0.203: v73.91,31.12 v71.75,31.12
N$41
  Top 0.406: J2.2-7 85.59,4.57 J2.2-8 85.59,13.44 R1.2
N$42
  Top 0.406: R2.2 89.67,14.15 J2.2-4 89.67,4.57 J2.2-5
N$43  (via drill 0.25)
  Top 0.203: R30.2 87.76,30.43 v87.76,30.99 | v89.79,30.99 89.79,30.43 R29.2 C33.1
  Bottom 0.203: v87.76,30.99 v89.79,30.99
N$44  (via drill 0.3)
  Top 0.203: R32.2 81.79,30.43 v81.79,31.12 | v83.82,31.12 83.82,30.3 R31.2 C34.1
  Bottom 0.203: v81.79,31.12 v83.82,31.12
N$45
  Top 0.406: T1.18 85.73,19.51 R3.1 85.73,17.08
N$46
  Top 0.406: R3.2 86.11,16.18 86.11,16.19 | 87.19,16.19 R1.1 R2.1
  Top 0.508: 86.11,16.19 86.3,16.19
  Top 0.762: 86.3,16.19 87.19,16.19 92.01,16.19 C6.1
N$51
  Top 0.508: J2.1-7 69.83,4.57 J2.1-8 69.83,10.15 72.14,12.45 R5.2
N$52
  Top 0.508: J2.1-4 73.91,4.57 J2.1-5 73.91,4.57 R4.2
N$54
  Top 0.203: R5.1 72.26,15.95 72.26,16.13 | R4.1 74.04,15.95 74.04,16.13
  Top 0.406: R6.2 75.31,16.18 75.56,16.13
  Top 0.762: 75.56,16.13 74.04,16.13 72.26,16.13 69.47,16.13 C7.1
NC  (1 unrouted)
P0_R_N
  Bottom 0.127: T1.17 83.77,19 82.93,18.16 82.93,12.72 87,8.65 87,5.72 87.38,5.33 J2.2-6
P0_R_P  (1 unrouted)
  Bottom 0.127: T1.16 81.77,18.94 82.55,18.16 82.55,12.56 86.61,8.49 86.61,4.89 87.06,4.45 89.79,4.45 90.04,4.19 | 89.98,4.25 J2.2-3
  Bottom 0.203: J2.2-3
P0_RX_N
  Top 0.203: U1.8 83.92,35.06 83.92,33.81 83.03,32.93 83.03,29.34 | 83.03,29.34 83.03,27.81 83.67,27.18 T1.4 | R31.1 83.64,29.34 83.03,29.34
P0_RX_P
  Top 0.203: U1.9 83.46,35.05 83.46,34 82.58,33.12 82.58,29.34 | 82.58,29.34 82.58,27.81 81.94,27.18 T1.5 | R32.1 81.97,29.34 82.58,29.34
P0_T_N
  Bottom 0.127: T1.20 88.96,18.75 88.96,17.92 89.68,17.21 90.12,17.21 91.06,16.27 91.06,5.91 91.63,5.33
  Bottom 0.203: 91.63,5.33 J2.2-2
P0_T_P
  Bottom 0.127: T1.19 88.58,18.75 88.58,17.77 89.52,16.83 89.96,16.83 90.68,16.11 90.68,4.89 91.25,4.32 91.95,4.32 92.71,3.56
  Bottom 0.203: 92.71,3.56 J2.2-1
P0_TX_N
  Top 0.203: U1.5 92.58,34.94 91.67,34.04 91.67,33.18 90.52,32.03 89.5,32.03 89,31.53 89,29.46 | 89,29.46 89,27.81 89.64,27.18 T1.1 | R29.1 89.08,29.39 89,29.46
P0_TX_P
  Top 0.203: U1.6 90.04,35.21 91.21,34.04 91.21,33.37 90.33,32.49 89.31,32.49 88.54,31.72 88.54,29.39 | 88.54,29.39 88.54,27.81 87.91,27.18 T1.2 | R30.1 88.54,29.39
P4_R_N
  Bottom 0.127: T1.12 73.77,19.1 72.96,18.29 72.96,9.45 71.18,7.67 71.18,5.97 71.82,5.33 J2.1-6
P4_R_P
  Bottom 0.127: T1.11 71.77,19.1 72.58,18.29 72.58,9.6 70.8,7.83 70.8,5.72 70.87,5.65 70.87,4.83 71.25,4.45 74.04,4.45 J2.1-3
P4_RX_N
  Top 0.203: U1.14 68.68,35.06 68.68,33.62 69.18,33.12 71.85,33.12 73.13,31.85 73.13,29.34 | 73.13,29.34 73.13,27.81 73.76,27.18 T1.9 | R35.1 73.74,29.34 73.13,29.34
P4_RX_P
  Top 0.203: U1.15 68.22,35.05 68.22,33.43 68.99,32.66 71.66,32.66 72.67,31.66 72.67,29.34 | 72.67,29.34 72.67,27.81 72.03,27.18 T1.10 | R36.1 72.06,29.34 72.67,29.34
P4_T_N
  Bottom 0.127: T1.15 79.77,19.26 78.8,18.29 78.8,11.35 75.31,7.86 75.31,5.65 75.63,5.33 J2.1-2
P4_T_P
  Bottom 0.127: T1.14 77.77,18.94 78.42,18.29 78.42,11.51 74.93,8.02 74.93,4.83 75.31,4.45 75.69,4.45 76.33,3.81 76.71,3.81 76.96,3.56
  Bottom 0.203: 76.96,3.56 J2.1-1
P4_TX_N
  Top 0.203: U1.11 76.3,35.06 76.3,34 76.8,33.5 78.33,33.5 78.97,32.86 78.97,29.46 | 78.97,29.46 78.97,27.69 79.48,27.18 T1.6 | R33.1 79.63,29.46 78.97,29.46
P4_TX_P
  Top 0.203: U1.12 75.84,35.05 75.84,33.81 76.61,33.05 78.14,33.05 78.51,32.67 78.51,29.34 | 78.51,29.34 78.51,27.69 78,27.18 T1.7 | R34.1 77.85,29.34 78.51,29.34
RESET_ROUTE  (via drill 0.33)
  Top 0.305: v49.02,24.38 49.02,30.99 v50.04,32 | v92.96,56.64 104.87,56.64 U1.43
  Bottom 0.305: ROUTER.3 34.67,18.92 33.53,20.07 33.53,23.37 34.29,24.13 48.77,24.13 v49.02,24.38 | v50.04,32 50.04,33.02 54.86,37.85 65.79,37.85 84.58,56.64 v92.96,56.64
UART_RX  (via drill 0.33)
  Top 0.305: U2.12 56.13,21.08 55.25,20.19 48.89,20.19 47.62,18.92 ROUTER.13 47.51,19.04 46.23,20.32 v46.23,31.24 | U1.33 82.42,59.05 v81.79,58.42
  Bottom 0.305: v81.79,58.42 81.79,55.88 65.28,39.37 54.36,39.37 v46.23,31.24
UART_TX  (via drill 0.33)
  Top 0.305: U1.34 84.96,59.56 v83.82,58.42 | v47.75,30.99 47.75,21.71 ROUTER.14 47.51,21.6 49.28,23.37 55.12,23.37 55.5,22.99 55.5,22.35 55.48,22.33 U2.11
  Bottom 0.305: v83.82,58.42 83.57,58.42 82.55,57.4 82.55,55.63 65.53,38.61 54.61,38.61 47.75,31.75 v47.75,30.99
USB_N
  Top 0.203: U1.50 105.5,38.59 106.55,39.65 108.11,39.65 109.63,38.13 109.63,29.08 | 109.63,29.08 109.63,24.48 106.08,20.93 103.16,20.93 101.24,19.02 101.24,15.02 103.16,13.11 106.21,13.11 USB-CON.2 | U4.3 109.59,29.05 109.63,29.08
USB_P
  Top 0.203: U1.49 105.53,41.14 106.55,40.11 108.3,40.11 110.08,38.32 110.08,29.08 | 110.08,29.08 110.08,24.29 106.27,20.47 103.35,20.47 101.7,18.83 101.7,15.21 103.35,13.56 106.21,13.56 USB-CON.3 | U4.2 110.12,29.05 110.08,29.08
VIN  (via drill 0.33, 0.51 pad 0.81)
  Top 0.305: R16.2 8.13,27.3 v8.13,27.18 | R9.2 6.93,46.56 v6.86,46.48
  Top 0.762: U7.2 24.8,27.12 | U6.2 21.28,46.93 21.34,46.99 | C28.1 24.8,27.12 | 24.8,27.12 C29.1 | C29.1 24.8,24.64 24.89,24.64 24.89,24.92 C29.1
  Top 1.016: L1.2 20.57,19.33 20.57,21.59 22.35,21.59 22.35,24.89 23.88,24.89
  Bottom 0.305: v8.13,27.18 10.92,27.18 11.18,27.18 11.43,27.18 16,22.61 22.1,22.61 | v6.86,46.48 11.94,46.48 14.48,43.94 14.48,42.93 15.49,41.91 19.05,41.91 19.81,42.67
  Bottom 1.016: 22.35,24.89 22.35,42.42
  other vias: 24.38,23.11 22.86,24.38 22.86,21.84 22.86,23.11 20.57,42.93 20.57,44.45 20.57,45.97 22.1,45.97
  pour Top (no thermals): 23.37,32 23.37,27.43 20.32,27.43 20.32,26.67 21.84,25.15 21.84,21.34 25.4,21.34 25.4,32
  pour Bottom (no thermals): 21.84,24.89 21.84,21.34 25.15,21.34 25.15,24.89
  pour Bottom (no thermals): 19.56,49.02 19.56,42.16 24.13,42.16 24.13,49.02
  pour Top (no thermals): 24.13,49.02 22.35,49.02 22.35,47.24 19.56,47.24 19.56,42.16 24.13,42.16

## Text on the board
tDocu: HE Start Kit V0.2
214bmp: D:/SmartProjects/Snc/a4_bn_logo2.bmp